# EAGLE board timer_switch (EAGLE 9.2.0)
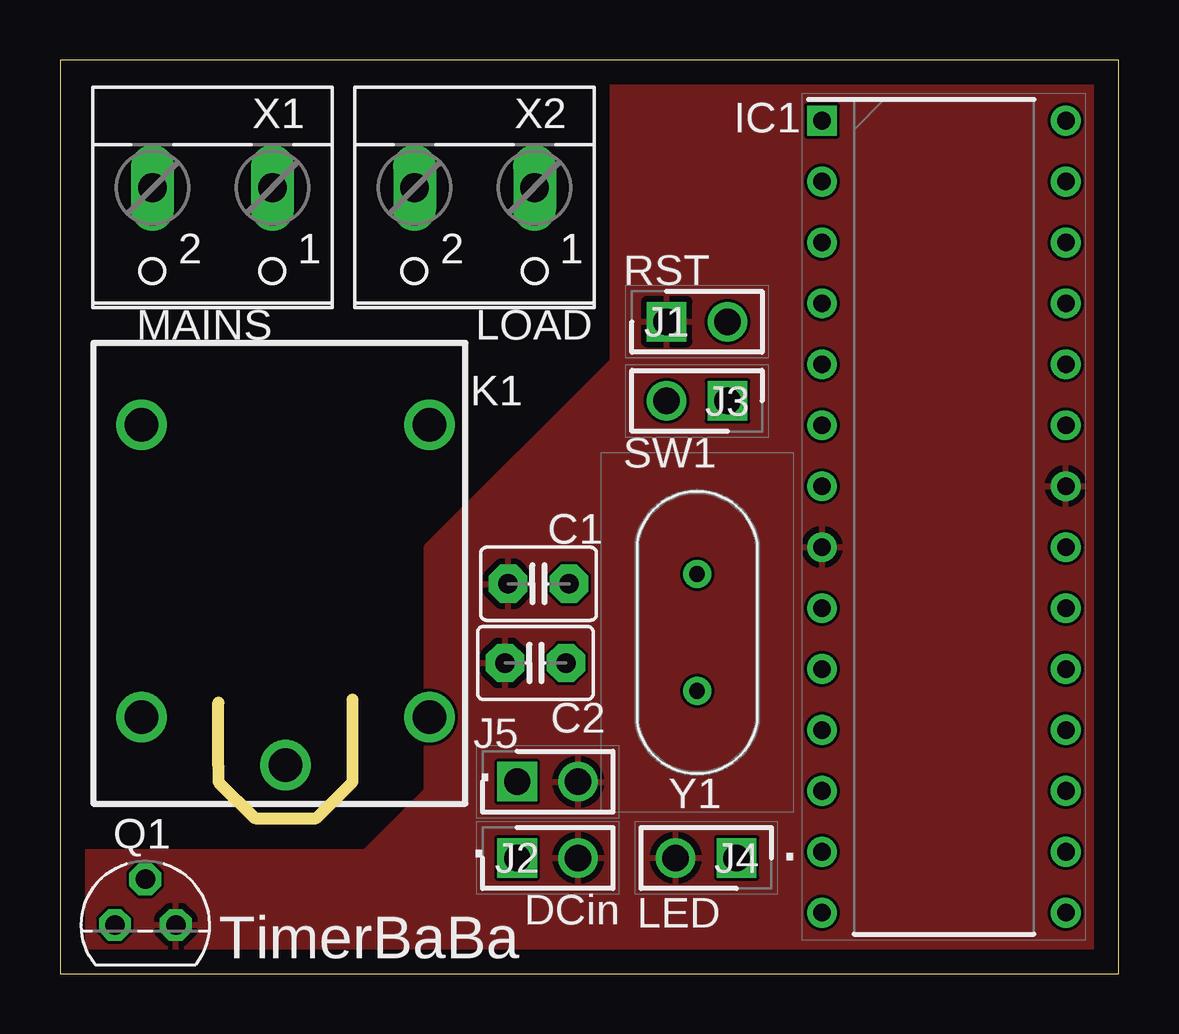
[diagram p0: board, top side]
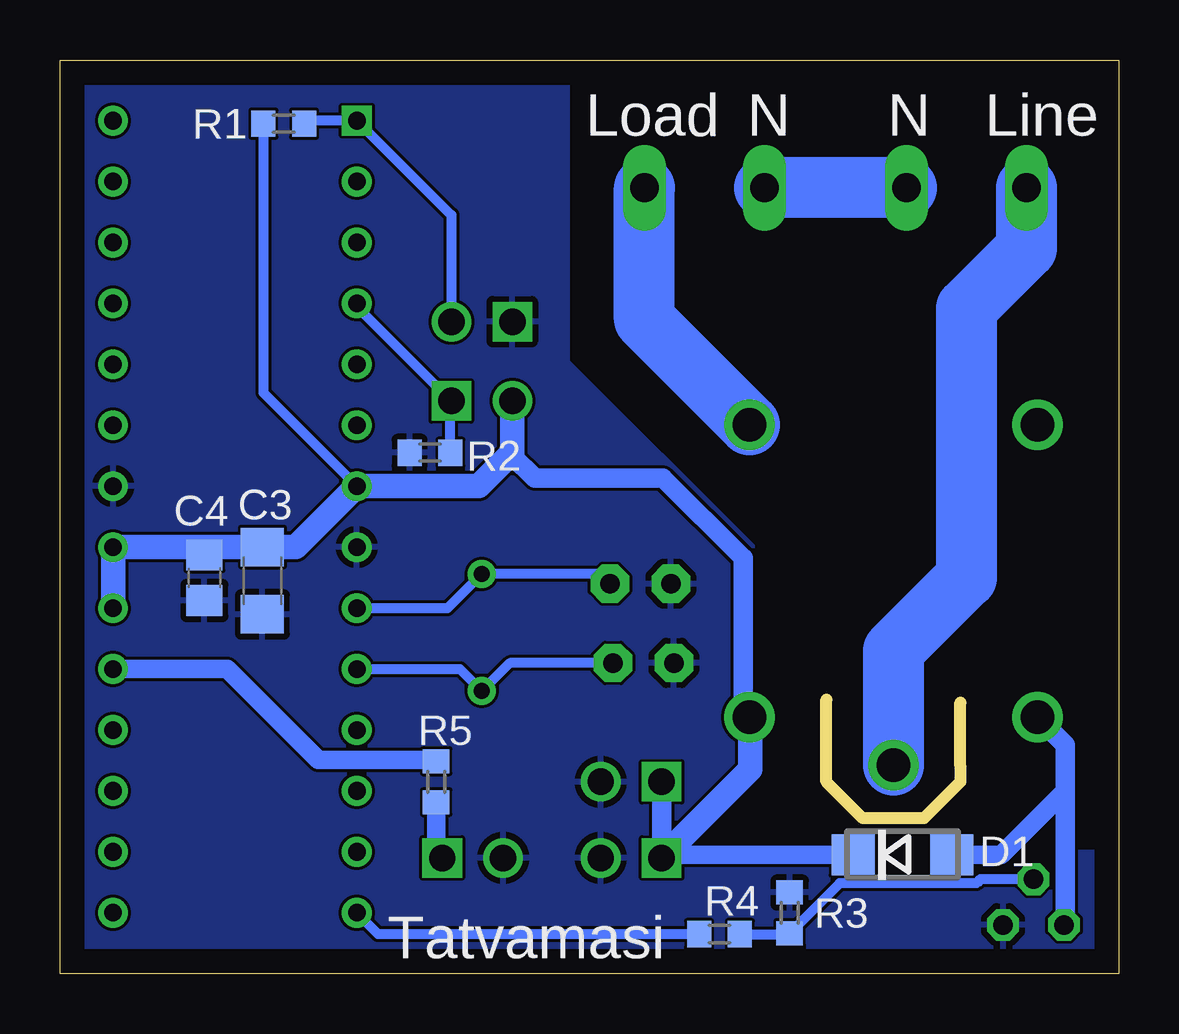
[diagram p1: board, bottom side, seen from below]

Size 44.12 x 38.09 mm. Coordinates in mm from the lower left corner, seen from the top.
Outline: 0,0 44.12,0 44.12,38.09 0,38.09 0,0
Copper layers (1*16): Top 0.035mm / dielectric 1.5mm / Bottom 0.035mm
Design rules "default *": minimum track width 6mil, minimum drill 0.35mm, track to track 0.125mm, track to pad 0.125mm, pad to pad 0.125mm, via to via 0.25mil, smd to smd 6mil, copper to edge 40mil, drill to drill 6mil, minimum pad ring 10mil, minimum via ring 8mil, stop-mask expansion 4mil, vias tented up to drill 0mil, thermal gap 10mil
Milling: 6 lines

## Footprints (pad centres in the part's own frame; a part is rotated, then mirrored left to right if it is on the bottom)
C2.5-3 = drill 0.813 pad 1.6 octagon: 1 -1.27,0; 2 1.27,0
C1206 = smd 1.6 x 1.8: 1 -1.4,0; 2 1.4,0
C0805 = smd 1.3 x 1.5: 1 -0.95,0; 2 0.95,0
DO214AC = smd 1.8 x 1.7: A 2.05,0; C -2.05,0
DIP1016W53P254L3467H457Q28N = drill 0.733 pad 1.133 square: 1 -5.08,16.51 | drill 0.733 pad 1.133: 2 -5.08,13.97; 3 -5.08,11.43; 4 -5.08,8.89; 5 -5.08,6.35; 6 -5.08,3.81; 7 -5.08,1.27; 8 -5.08,-1.27; 9 -5.08,-3.81; 10 -5.08,-6.35; 11 -5.08,-8.89; 12 -5.08,-11.43; 13 -5.08,-13.97; 14 -5.08,-16.51; 15 5.08,-16.51; 16 5.08,-13.97; 17 5.08,-11.43; 18 5.08,-8.89; 19 5.08,-6.35; 20 5.08,-3.81; 21 5.08,-1.27; 22 5.08,1.27; 23 5.08,3.81; 24 5.08,6.35; 25 5.08,8.89; 26 5.08,11.43; 27 5.08,13.97; 28 5.08,16.51
HDRV2W64P0X254_1X2_508X254X864 = drill 1.1 pad 1.65 square: 1 0,0 | drill 1.1 pad 1.65: 2 2.54,0
ORWH-1T = drill 1.4 pad 2.1: 1 3.4,-13.5; 2 15.6,-13.5; 3 17.6,-7.5; 4 15.6,-1.5; 5 3.4,-1.5
TO92 = drill 0.813 octagon: 1 1.27,0; 2 0,1.905; 3 -1.27,0
R0603 = smd 1 x 1.1: 1 -0.85,0; 2 0.85,0
W237-102 = drill 1.194 long: 1 -2.5,-1.27; 2 2.5,-1.27
HC/49US_(AT49)PTH = drill 0.66 pad 1.1: 1 -2.44,0; 2 2.44,0

## Placement (x,y rotation side)
C1  22pF  [C2.5-3]  19.94,16.26 180 top
C2  22pF  [C2.5-3]  19.81,12.95 180 top
C3  [C1206]  35.69,16.38 270 bottom
C4  [C0805]  38.1,16.51 270 bottom
D1  [DO214AC]  9.02,4.95 0 bottom
IC1  ATMEGA8L-8PU  [DIP1016W53P254L3467H457Q28N]  36.83,19.05 0 top
J1  RST  [HDRV2W64P0X254_1X2_508X254X864]  25.27,27.18 0 top
J2  DCin  [HDRV2W64P0X254_1X2_508X254X864]  19.05,4.83 0 top
J3  SW1  [HDRV2W64P0X254_1X2_508X254X864]  27.81,23.88 180 top
J4  LED  [HDRV2W64P0X254_1X2_508X254X864]  28.19,4.83 180 top
J5  RST  [HDRV2W64P0X254_1X2_508X254X864]  19.05,8 0 top
K1  ORWH-SH-112D1F,000  [ORWH-1T]  16.89,26.29 270 top
Q1  BC547  [TO92]  3.56,2.03 0 top
R1  10K  [R0603]  34.8,35.43 180 bottom
R2  10K  [R0603]  28.7,21.72 180 bottom
R3  10K  [R0603]  13.72,2.54 90 bottom
R4  1K  [R0603]  16.64,1.65 0 bottom
R5  [R0603]  28.45,8 90 bottom
X1  MAINS  [W237-102]  6.35,31.5 180 top
X2  LOAD  [W237-102]  17.27,31.5 180 top
Y1  16MHz  [HC/49US_(AT49)PTH]  26.54,14.22 90 top

## Library data of the parts
C1 C2 = capacitor-wima
C3 C4 = rcl; SPICEPREFIX: C
D1 = diode
IC1 = timer_switch; ARROW_PART_NUMBER: ATMEGA8L-8PU; ARROW_PRICE-STOCK: https://www.arrow.com/en/products/atmega8l-8pu/microchip-technology; DESCRIPTION: MICROCHIP - ATMEGA8L-8PU - MCU, 8BIT, ATMEGA, 8MHZ, DIP-28; HEIGHT: 4.572mm; MANUFACTURER_NAME: Microchip; MANUFACTURER_PART_NUMBER: ATMEGA8L-8PU; RS_PART_NUMBER: 1310375; RS_PRICE-STOCK: http://uk.rs-online.com/web/p/products/1310375
J1-J5 = timer_switch; ALLIED_NUMBER: R1052478; ALLIED_PRICE-STOCK: https://www.alliedelec.com/harwin-m20-9990246/R1052478/; ARROW_PART_NUMBER: M20-9990246; ARROW_PRICE-STOCK: http://uk.rs-online.com/web/p/products/1730800; DESCRIPTION: HARWIN M20-9990246. Board-To-Board Connector, Straight, 2.54 mm, 2 Contacts, Header, M20 Series, Through Hole; HEIGHT: 8.64mm; MANUFACTURER_NAME: HARWIN; MANUFACTURER_PART_NUMBER: M20-9990246; RS_PART_NUMBER: 1730800; RS_PRICE-STOCK: http://uk.rs-online.com/web/p/products/1730800
K1 = timer_switch; ARROW_PART_NUMBER: ORWH-SH-112D1F,000; ARROW_PRICE-STOCK: https://www.arrow.com/en/products/orwh-sh-112d1f000/te-connectivity; DESCRIPTION: Relay Power PCB 10A 12VDC wash tight 1CO Through Hole Non-Latching Relay Solder, 10 A, 12V dc; HEIGHT: mm; MANUFACTURER_NAME: TE Connectivity; MANUFACTURER_PART_NUMBER: ORWH-SH-112D1F,000; RS_PART_NUMBER: 7917592P; RS_PRICE-STOCK: http://uk.rs-online.com/web/p/products/7917592P
Q1 = transistor-npn
R1-R4 = eagle-ltspice; SPICEMODEL: NONE; SPICEPREFIX: R
R5 = resistor
X1 X2 = con-wago-500; MPN: 237-102; OC_FARNELL: unknown; OC_NEWARK: 70K9898
Y1 = timer_switch; ARROW_PART_NUMBER: ABL-20.000MHZ-B2; ARROW_PRICE-STOCK: https://www.arrow.com/en/products/abl-20.000mhz-b2/abracon; DESCRIPTION: ABRACON - ABL-20.000MHZ-B2 - CRYSTAL, 20MHZ, 18PF CL, HC49/4H; HEIGHT: mm; MANUFACTURER_NAME: ABRACON; MANUFACTURER_PART_NUMBER: ABL-20.000MHZ-B2; RS_PART_NUMBER: 1710202; RS_PRICE-STOCK: http://uk.rs-online.com/web/p/products/1710202

## Nets
5V: C3.1 C4.1 D1.C IC1.7 IC1.20 IC1.21 J2.1 J3.2 J5.1 K1.4 R1.2
D13: IC1.19 R5.2
GND: C1.2 C2.2 C3.2 C4.2 IC1.8 IC1.22 J1.1 J2.2 J4.2 J5.2 Q1.1 R2.2 R3.2
LOAD_LINE: K1.3 X1.2
MAINS_LINE: K1.5 X2.1
MAINS_NEU: X1.1 X2.2
N$4: D1.A K1.2 Q1.3
N$5: Q1.2 R3.1 R4.2
N$6: J4.1 R5.1
RELAY1: IC1.14 R4.1
SW1: IC1.4 J3.1 R2.1
SW2: IC1.5
X1: C1.1 IC1.9 Y1.2
X2: C2.1 IC1.10 Y1.1
~RESET: IC1.1 J1.2 R1.1

## Tracks (layer width: path | path; a pad name or v marks a point on that pad's centre or on a via)
5V
  Bottom 0.406: 25.27,21.72 J3.2 | R1.2 35.65,24.22 IC1.7 | C3.1 37.78,17.78 C4.1
  Bottom 0.508: C3.1 38.1,17.78
  Bottom 0.762: D1.C 18.92,4.95 J2.1
  Bottom 0.813: 25.27,21.59 24.35,20.66 19,20.66 15.66,17.33 15.66,13.5 15.66,10.67 15.37,10.67 K1.4 | J5.1 J2.1
  Bottom 1.016: 25.27,21.72 26.67,20.32 IC1.7 34.29,17.78 38.1,17.78 IC1.21 IC1.20 | 25.27,21.59 J3.2 | J2.1 15.37,8.51 15.37,10.67
D13
  Bottom 0.762: R5.2 28.5,8.91 33.36,8.91 37.15,12.7 IC1.19
GND
  pour Bottom: 22.99,38.1 22.99,25.53 15.24,17.78 15.24,7.62 12.7,5.08 0,5.08 0,0 22.86,0 44.2,0 44.2,38.1
  pour Top: 22.99,38.1 22.99,25.53 15.24,17.78 15.24,7.62 12.7,5.08 0,5.08 0,0 22.86,0 44.2,0 44.2,38.1
LOAD_LINE
  Bottom 2.54: K1.3 9.39,13.47 6.35,16.51 6.35,27.73 3.85,30.23 X1.2
MAINS_LINE
  Bottom 2.54: K1.5 19.77,27.27 X2.1
MAINS_NEU
  Bottom 2.54: X1.1 X2.2
N$4
  Bottom 0.762: D1.A 4.9,4.95 2.23,7.62
  Bottom 0.813: Q1.3 2.23,2.56 2.23,7.62 2.23,9.53 K1.2
N$5
  Bottom 0.406: Q1.2 5.77,3.94 5.93,3.77 11.63,3.77 R3.1 13.76,1.65 R4.2
N$6
  Bottom 0.762: R5.1 28.45,5.08 J4.1
RELAY1
  Bottom 0.406: R4.1 30.86,1.65 IC1.14
SW1
  Bottom 0.406: R2.1 27.85,23.91 | 27.85,23.91 J3.1 | 27.85,23.91 | IC1.4 31.75,27.81 27.85,23.91
X1
  Bottom 0.406: IC1.9 27.97,15.24 Y1.2 21.62,16.66 C1.1
X2
  Bottom 0.406: C2.1 25.37,12.95 Y1.1 27.46,12.7 IC1.10
~RESET
  Bottom 0.406: R1.1 33.82,35.56 IC1.1 27.81,31.62 J1.2

## Text on the board
tPlace: . | . | . | TimerBaBa
bPlace: Line | N | N | Load | Tatvamasi
_tNames: X1 | X2 | IC1 | J1 | K1 | J3 | C1 | C2 | Y1 | Q1 | J2 | J4
_bNames: R1 | R2 | C4 | C3 | R5 | D1 | R4 | R3